# Altium PCB BM71Breakout.PcbDoc
Units mm, origin at the board's own origin, x right, y up, seen from the top; angles counter-clockwise.
Board outline 152.4 x 101.6 mm, 2 copper layers (Top Layer, Bottom Layer); 2 components, 16 nets, 32 pads, 5 vias.
Unrouted connection lines stored in the file: 2.
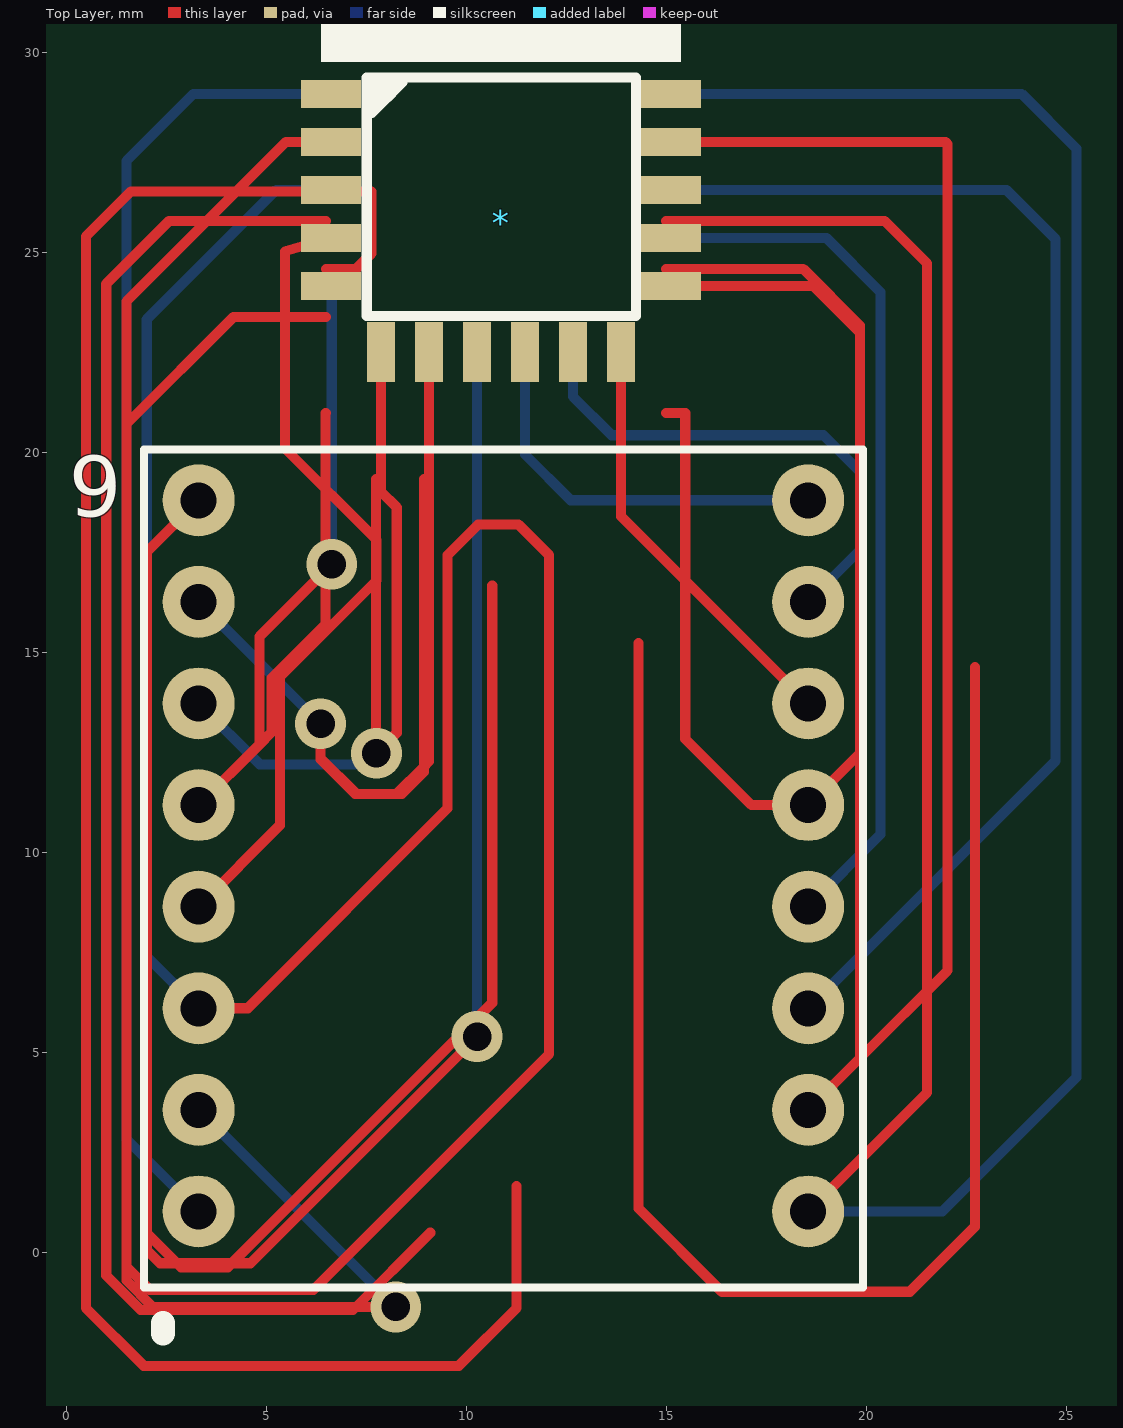
[diagram p0: Top Layer view]
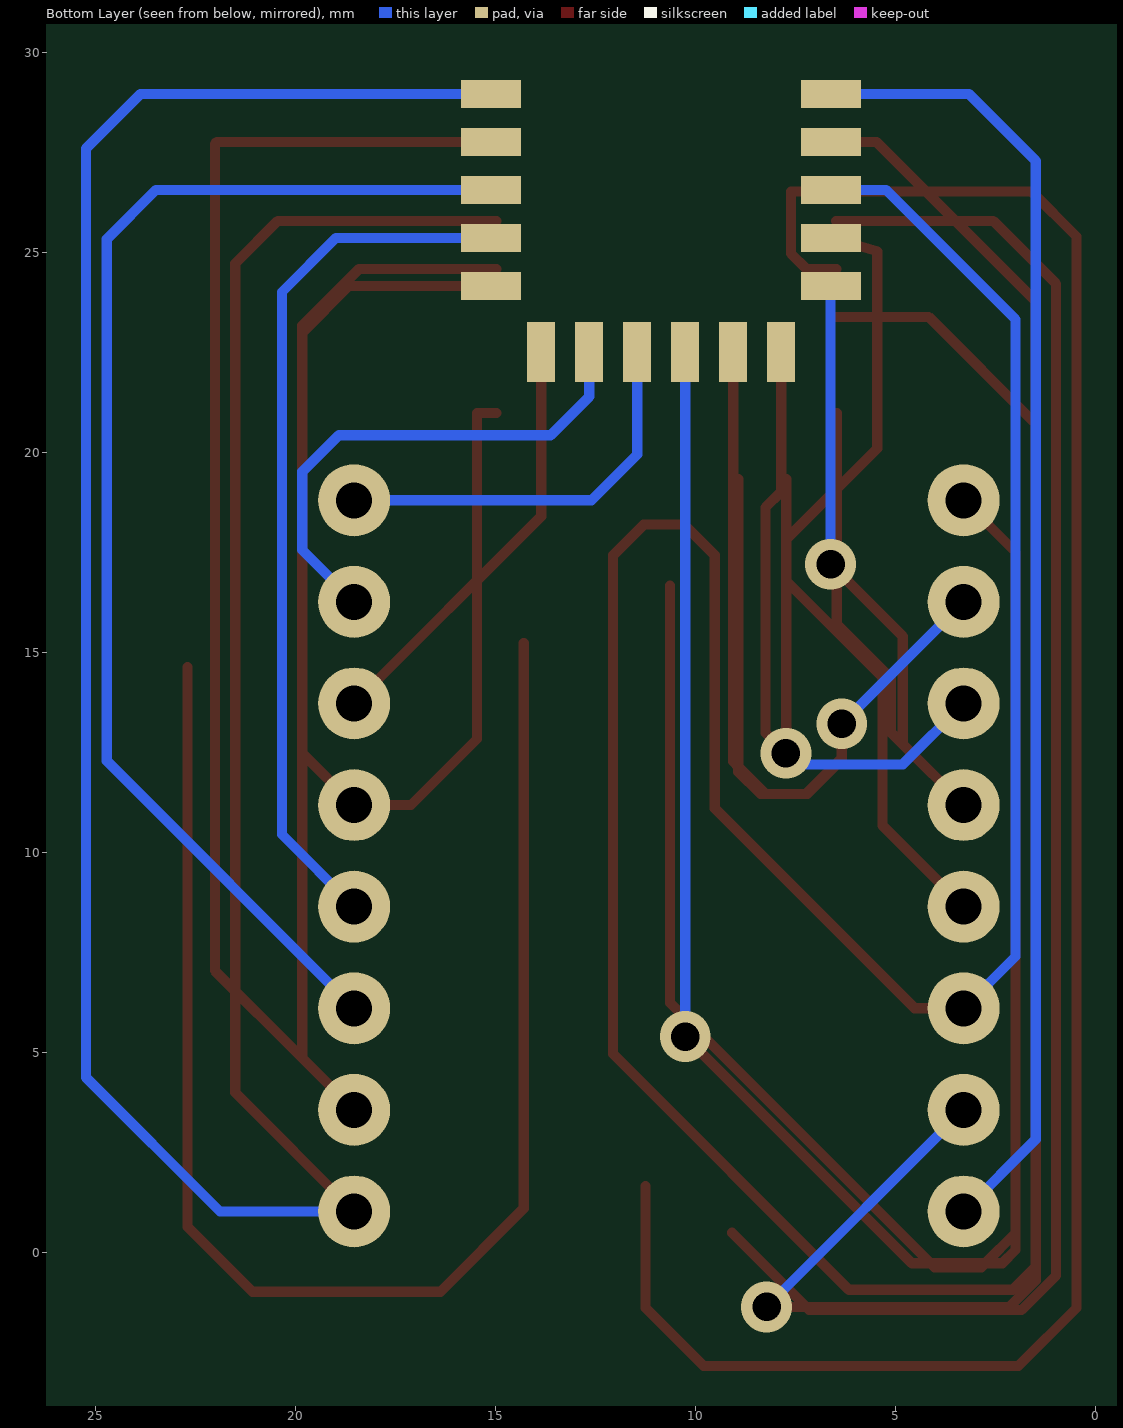
[diagram p1: Bottom Layer view, seen from below]

## Layer stack, top to bottom
Top Solder: solder mask 0.0102, Solder Resist, Dk 3.5
Top Layer: signal copper 0.0356
Dielectric 1: dielectric 0.32, FR-4, Dk 4.8
Bottom Layer: signal copper 0.0356
Bottom Solder: solder mask 0.0102, Solder Resist, Dk 3.5

## Board outline
-49.149,-31.496 103.251,-31.496 103.251,70.104 -49.149,70.104

## Design rules (kind name [scope] priority, off if disabled: settings)
Clearance Clearance_1 [All] p1: gap=0.254 ignorepadtopadclearanceinfootprint=FALSE except(0: Arc-Hole Track-Hole SMDPad-Hole THPad-Hole Via-Hole Fill-Hole Poly-Hole Region-Hole Text-Hole)
Clearance [All] p2: gap=0.254 ignorepadtopadclearanceinfootprint=FALSE except(0: Arc-Hole Track-Hole SMDPad-Hole THPad-Hole Via-Hole Fill-Hole Poly-Hole Region-Hole Text-Hole)
PolygonConnect [All] p1: connectstyle=Relief reliefconductorwidth=0.254 reliefentries=4 polygonreliefangle="90 Angle" airgapwidth=0.254
RoutingVias [All] p1: holewidth=0.711 width=1.27 viastyle="Through Hole" minholewidth=0.711 minwidth=1.27 maxholewidth=0.711 maxwidth=1.27
SolderMaskExpansion [All] p1: expansion=0.102
Width [All] p1: maxlimit=0.254 minlimit=0.254 preferedwidth=0.254
30 further rules are at their usual default settings.

## Components (designator, comment, footprint, x,y, rotation, side; value= is the part's Value field where it differs from the comment)
9 "17pin_DOUBLE_0.1_header" 17pin_DOUBLE_0.1_header 18.542,1.016 r0 top
* "BM71 Bluetooth Module" BM71BLES1FC2 6.363,22.256 r0 top

## Footprints (in the part's own frame and the unit in brackets; to place one, negate y for a bottom-side part, rotate by r counter-clockwise, add the part's x,y. Pads: shape width x height; smd on the part's side, far side on the other; paste and mask are expansions set on the pad)
17pin_DOUBLE_0.1_header [mm]
  round 1.8 hole 0.9: 1(-15.24,0) 2(-15.24,2.54) 3(-15.24,5.08) 4(-15.24,7.62) 5(-15.24,10.16) 6(-15.24,12.7) 7(-15.24,15.24) 8(-15.24,17.78) 9(0,17.78) 10(0,15.24) 11(0,12.7) 12(0,10.16) 13(0,7.62) 14(0,5.08) 15(0,2.54) 16(0,0)
  silkscreen extent -16.61,-3.05 1.37,19.05, body extent -15.49,-0.44 0.25,18.22, height 4
BM71BLES1FC2 [mm] "Bluetooth Module"
  rect 1.5x0.7 all layers, no hole: 1(0.25,6.7) 2(0.25,5.5) 3(0.25,4.3) 4(0.25,3.1) 5(0.25,1.9) 12(8.75,1.9) 13(8.75,3.1) 14(8.75,4.3) 15(8.75,5.5) 16(8.75,6.7)
  rect 0.7x1.5 all layers, no hole: 6(1.5,0.25) 7(2.7,0.25) 8(3.9,0.25) 9(5.1,0.25) 10(6.3,0.25) 11(7.5,0.25)
  silkscreen extent 0,1.14 9,11.5

## Via types
v1: diameter 1.27, hole 0.711, Top Layer to Bottom Layer, 5 vias

## Nets (pads, with @x,y where several pads share a name; then routed paths per layer and width w, separated by ;. In a path a pad name is that pad's centre, name@x,y a point inside that pad or via, vN(x,y) a via of type N, cw(c..) or ccw(c..) an arc to the next point about the centre after c; other vN are vias at no path point)
Net*_1: 9.1 *.1 | length 73
  Top Layer w0.254: 6.486,25.781 2.565,25.781 0.991,24.206 0.991,-0.584 1.854,-1.448 7.163,-1.448 9.093,0.483
  Bottom Layer w0.254: 9.1 1.499,2.819 1.499,27.28 3.175,28.956 *.1
Net*_2: 9.2 *.2 | length 97.5
  Top Layer w0.254: 6.486,24.581 7.239,24.581 7.62,24.962 7.62,26.518 4.248,26.518 ; *.2 5.486,27.756 4.248,26.518 ; v1(8.23,-1.372) 2.159,-1.372 1.499,-0.711 1.499,23.768 4.248,26.518 ; 11.252,1.651 11.252,-1.397 9.804,-2.845 1.93,-2.845 0.483,-1.397 0.483,25.389 1.611,26.518 4.248,26.518
  Bottom Layer w0.254: 9.2 v1(8.23,-1.372)
Net*_3: 9.3 *.3 | length 94.4
  Top Layer w0.254: 9.3 4.529,6.096 9.525,11.092 9.525,17.424 10.287,18.186 11.303,18.186 12.065,17.424 12.065,4.953 6.172,-0.94 2.08,-0.94 1.499,-0.358 1.499,20.701 4.179,23.381 6.486,23.381
  Bottom Layer w0.254: 9.3 2.007,7.391 2.007,23.317 5.245,26.556 *.3
Net*_4: 9.4 *.4 | length 20.4
  Top Layer w0.254: 9.4 5.334,10.668 5.334,14.376 7.747,16.789 7.747,17.805 5.461,20.091 5.461,25.019 *.4
Net*_5: 9.5 *.5 | length 23.3
  Top Layer w0.254: 9.5 4.826,12.7 ; 6.486,20.981 6.477,20.981 v1@6.477,17.043 ; v1(6.629,17.196) v1@6.477,17.043 ; 4.826,12.7 4.826,15.392 v1@6.477,17.043 ; 4.826,12.7 5.125,12.999 5.125,14.351 6.477,15.703 v1@6.477,17.043
  Bottom Layer w0.254: *.5 6.629,24.156 v1(6.629,17.196)
Net*_6: 9.6 *.6 | length 22.5
  Top Layer w0.254: v1@7.736,12.471 7.736,19.331 ; v1(7.747,12.471) 8.255,12.979 8.255,18.618 7.863,19.01 *.6
  Bottom Layer w0.254: 9.6 4.826,12.192 7.468,12.192 v1(7.747,12.471)
Net*_7: 9.7 *.7 | length 28.3
  Top Layer w0.254: v1(6.35,13.208) 6.35,12.344 ; 8.936,19.331 8.936,12.136 ; *.7 9.063,12.263 8.936,12.136 ; 6.35,12.344 7.239,11.455 ; 6.35,12.344 6.35,12.319 7.214,11.455 7.239,11.455 ; 7.239,11.455 8.255,11.455 ; 8.255,11.455 8.382,11.455 8.936,12.009 8.936,12.136 ; 8.255,11.455 8.936,12.136
  Bottom Layer w0.254: 9.7 v1(6.35,13.208)
Net*_8: 9.8 *.8 | length 69.3
  Top Layer w0.254: 9.8 2.007,17.501 2.007,0.475 ; v1(10.263,5.386) 4.597,-0.279 4.133,-0.279 ; 10.643,16.662 10.643,6.23 4.133,-0.279 ; 2.007,0.475 2.761,-0.279 ; 2.007,0.475 2.007,0.051 2.337,-0.279 2.761,-0.279 ; 2.761,-0.279 4.133,-0.279 ; 2.761,-0.279 2.863,-0.381 4.031,-0.381 4.133,-0.279
  Bottom Layer w0.254: v1(10.263,5.386) *.8
Net*_9: 9.9 *.9 | length 48.2
  Top Layer w0.254: 14.3,15.222 14.3,1.092 16.383,-0.991 21.082,-0.991 22.708,0.635 22.708,14.63
  Bottom Layer w0.254: *.9 11.463,19.939 12.606,18.796 9.9
Net*_10: 9.10 *.10 | length 12.9
  Bottom Layer w0.254: *.10 12.663,21.387 13.628,20.422 18.923,20.422 19.837,19.507 19.837,17.551 9.10
Net*_11: 9.11 *.11 | length 10.7
  Top Layer w0.254: *.11 13.863,18.395 9.11
Net*_12: 9.12 *.12 | length 30
  Top Layer w0.254: 14.986,20.981 15.469,20.981 15.469,12.827 17.12,11.176 9.12 19.837,12.471 19.837,22.987 18.668,24.156 *.12
Net*_13: 9.13 *.13 | length 21.9
  Bottom Layer w0.254: *.13 18.992,25.356 20.345,24.003 20.345,10.439 9.13
Net*_14: 9.14 *.14 | length 31.9
  Bottom Layer w0.254: *.14 23.495,26.556 24.727,25.324 24.727,12.281 9.14
Net*_15: 9.15 *.15 | length 56.3
  Top Layer w0.254: 14.986,24.581 18.415,24.581 19.837,23.159 19.837,4.851 ; *.15 21.971,27.756 22.022,27.705 22.022,7.036 19.837,4.851 ; 9.15 19.837,4.851
Net*_16: 9.16 *.16 | length 73.9
  Top Layer w0.254: 14.986,25.781 20.447,25.781 21.514,24.714 21.514,3.988 9.16
  Bottom Layer w0.254: *.16 23.876,28.956 25.248,27.584 25.248,4.369 21.895,1.016 9.16